# Altium PCB PCBkey.PcbDoc
Units mil, origin at the board's own origin, x right, y up, seen from the top; angles counter-clockwise.
Board outline 6000 x 4000 mil, 2 copper layers (Top Layer, Bottom Layer); 91 components, 86 nets, 358 pads, 2 vias.
Unrouted connection lines stored in the file: 235.
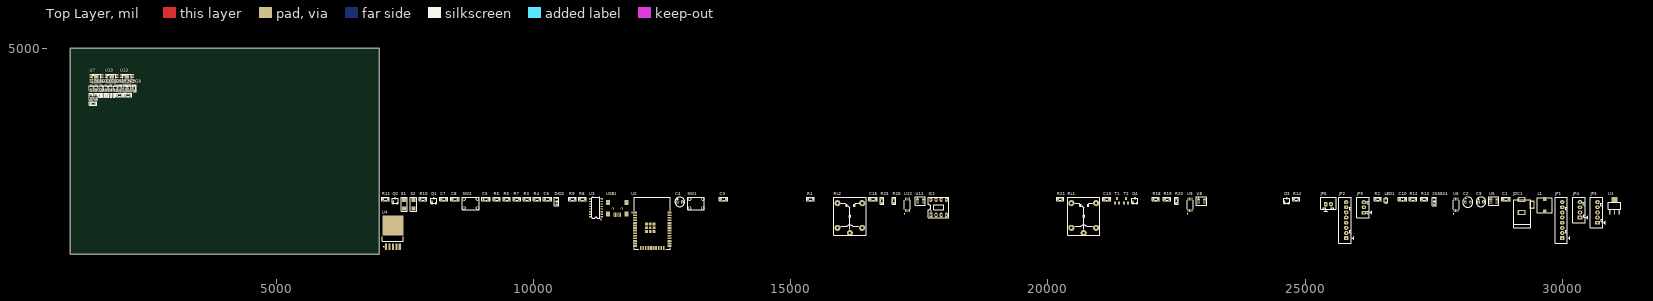
[diagram p0: Top Layer view]
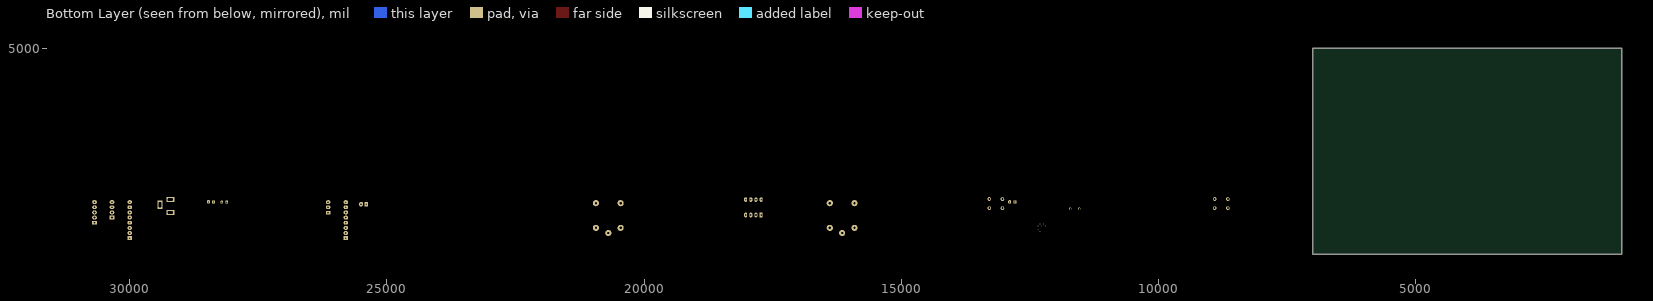
[diagram p1: Bottom Layer view, seen from below]

## Layer stack, top to bottom
Top Solder: solder mask 0.4, Solder Resist, Dk 3.5
Top Layer: signal copper 1.4
Dielectric 1: dielectric 12.6, FR-4, Dk 4.8
Bottom Layer: signal copper 1.4
Bottom Solder: solder mask 0.4, Solder Resist, Dk 3.5

## Board outline
1000,1000 7000,1000 7000,5000 1000,5000

## Design rules (kind name [scope] priority, off if disabled: settings)
Clearance [All] p1: gap=10 ignorepadtopadclearanceinfootprint=FALSE except(0: Arc-Hole Track-Hole SMDPad-Hole THPad-Hole Via-Hole Fill-Hole Poly-Hole Region-Hole Text-Hole)
PolygonConnect [All] p1: connectstyle=Relief reliefconductorwidth=10 reliefentries=4 polygonreliefangle="90 Angle" airgapwidth=10
RoutingVias [All] p1: holewidth=28 width=50 viastyle="Through Hole" minholewidth=28 minwidth=50 maxholewidth=28 maxwidth=50
SolderMaskExpansion [All] p1: expansion=4
Width [All] p1: maxlimit=10 minlimit=10 preferedwidth=10
30 further rules are at their usual default settings.

## Components (designator, comment, footprint, x,y, rotation, side; value= is the part's Value field where it differs from the comment)
1N5824 "Diode SMD" DIO-SMD-123 27505,2025 r90 top value=1N5007
C1 "104" CAP_0805 28900,2075 r0 top value=33p
C2 "680 uF" C5mm 28160,2010 r0 top
C3 "100nF" CAP_0805 13695,2075 r0 top value=33p
C4 "Cap Pol" C3MM 12845,2015 r0 top
C5 "100nF" CAP_0805 9080,2075 r0 top value=33p
C6 "104" CAP_0805 10275,2075 r0 top value=33p
C7 "104" CAP_0805 8260,2075 r0 top value=33p
C8 "104" CAP_0805 8475,2075 r0 top value=33p
C9 "220 uF" C3MM 28415,2015 r0 top
C10 "0.1 uF" CAP_0805 26890,2075 r0 top value=33p
C11 "10 uF" CAP_0402 1736.78,4089.12 r90 top value=33p
C12 "10 uF" CAP_0402 1791.72,4089.12 r90 top value=33p
C13 "0.1 uF" CAP_0805 21145,2075 r0 top value=33p
C14 "10 uF" CAP_0402 1846.65,4089.12 r90 top value=33p
C15 "10 uF" CAP_0402 1571.97,4089.12 r90 top value=33p
C16 "0.1 uF" CAP_0805 16600,2075 r0 top value=33p
C17 "10 uF" CAP_0402 1626.91,4089.12 r90 top value=33p
C18 "10 uF" CAP_0402 1681.84,4089.12 r90 top value=33p
DIO2 "Diode SMD" DIO-SMD-123 10450,2025 r90 top value=1N5007
IC1 "LM741" DIP8/W0.3 17725,1760 r0 top
JDC1 "Jac DC" DC-IN 29305,1935 r90 top
JP1 "KeyPad" CON8 29995,1310 r90 top value="Connector 8"
JP2 "RFID" CON8 25795,1310 r90 top value="Connector 8"
JP3 "motor" CON5 30680,1610 r90 top value="Connector 5"
JP4 "LCD_I2C" CON4 30340,1710 r90 top value="Connector 4"
JP5 "servo" CON3 26140,1810 r90 top value="Connector 3"
JP6 "JP2" CON2 25400,1970 r0 top value="Connector 2"
L1 "33 uH" L-SMD-M-7.3x4.5 29655,1950 r0 top
LED1 "LED" LED-0805-Red 26570,1995 r90 top value="LED 3 ly Single Colour"
LED2 "LED" LED-0805-Red 1689,4178.08 r90 top value="LED 3 ly Single Colour"
LED3 "LED" LED-0805-Green 1783,4178.08 r90 top value="LED 3 ly Single Colour"
LED4 "LED" LED-0805-Red 1877,4178.08 r90 top value="LED 3 ly Single Colour"
LED5 "LED" LED-0805-Green 1407,4178.08 r90 top value="LED 3 ly Single Colour"
LED6 "LED" LED-0805-Red 1501,4178.08 r90 top value="LED 3 ly Single Colour"
LED7 "LED" LED-0805-Green 1595,4178.08 r90 top value="LED 3 ly Single Colour"
Q1 "2N222" SOT23D 8065,2035 r0 top value=C1815
Q2 "2N222" SOT23D 7315,2035 r0 top value=C1815
Q3 "2N222" SOT23D 24640,2035 r0 top value=C1815
Q4 "2N222" SOT23D 21690,2035 r0 top value=C1815
R1 "10k" RES-SMD-0805 15385,2075 r0 top
R2 "1k" RES-SMD-0805 26410,2075 r0 top
R3 "12k" RES-SMD-0805 9875,2075 r0 top
R4 "12k" RES-SMD-0805 10070,2075 r0 top
R5 "470" RES-SMD-0805 9290,2075 r0 top
R6 "470" RES-SMD-0805 9485,2075 r0 top
R7 "10k" RES-SMD-0805 9680,2075 r0 top
R8 "470" RES-SMD-0805 10955,2075 r0 top
R9 "470" RES-SMD-0805 10760,2075 r0 top
R10 "12k" RES-SMD-0805 7855,2075 r0 top
R11 "12k" RES-SMD-0805 7125,2075 r0 top
R12 "1k" RES-SMD-0805 27095,2075 r0 top
R13 "100" RES-SMD-0805 27315,2075 r0 top
R14 "1k" RES-SMD-0805 24825,2075 r0 top
R15 "1k" RES-SMD-0805 1442.5,3928.58 r0 top
R16 "1k" RES-SMD-0805 2121.12,4093.58 r0 top
R17 "1.2k" RES-SMD-0805 1956.12,4093.58 r0 top
R18 "1k" RES-SMD-0805 22095,2075 r0 top
R19 "100" RES-SMD-0805 22315,2075 r0 top
R20 "1k" RES-SMD-0805 22495,2040 r90 top
R21 "1k" RES-SMD-0805 20240,2075 r0 top
R22 "1k" RES-SMD-0805 1497.5,4056.58 r90 top
R23 "1k" RES-SMD-0805 1405.5,4056.58 r90 top
R24 "1.2k" RES-SMD-0805 2061.5,4224.58 r90 top
R25 "1k" RES-SMD-0805 16775,2040 r90 top
R26 "100" RES-SMD-0805 17005,2040 r90 top
R27 "1k" RES-SMD-0805 1969.5,4224.58 r90 top
R28 "1k" RES-SMD-0805 2245.5,4224.58 r90 top
R29 "1.2k" RES-SMD-0805 2153.5,4224.58 r90 top
RL1 "Relay 10A/12V" RL_SPDT_10A 20695,1410 r90 top value="Relay SPDT, 10A, 12V"
RL2 "Relay 10A/12V" RL_SPDT_10A 16150,1410 r90 top value="Relay SPDT, 10A, 12V"
S1 "SW-SMD" "SW 3x2x4" 7490,1970 r90 top
S2 "SW-SMD" "SW 3x2x4" 7670,1970 r90 top
SW1 "SW-4P-S" SW-4P-S 13035,2070 r0 top
SW2 "SW-4P-S" SW-4P-S 8655,2070 r0 top
T1 "A03401" A3401 21345,2040 r0 top
T2 "A03401" A3401 21520,2040 r0 top
U1 "LM1117-ADJ" LM1117-SOP 31010,1870 r0 top
U2 "ESP32-WROOM-32" MODULE_ESP32-WROOM-32 12310,1600 r0 top
U3 "CH340C" SO016 11215,1900 r90 top
U4 "LM2976" TO-263 7270,1380 r90 top
U5 "DW01A" SOT23-6 28665,2030 r0 top
U6 "FS8205A" FS8205A 27935,1960 r90 top
U7 "TP4056" TP4056 1507.86,4413.54 r0 top
U8 "DW01A" SOT23-6 22985,2030 r0 top
U9 "FS8205A" FS8205A 22765,1960 r90 top
U10 "TP4056" TP4056 1803.57,4413.54 r0 top
U11 "DW01A" SOT23-6 17520,2030 r0 top
U12 "FS8205A" FS8205A 17270,1960 r90 top
U13 "TP4056" TP4056 2099.29,4413.54 r0 top
USB1 "USB_M" USB_B_MINI_SMD 11690,1765 r0 top

## Footprints (in the part's own frame and the unit in brackets; to place one, negate y for a bottom-side part, rotate by r counter-clockwise, add the part's x,y. Pads: shape width x height; smd on the part's side, far side on the other; paste and mask are expansions set on the pad)
A3401 [mm] "P-Channel 30V 4A _Ta_ 1.4W _Ta_ Surface Mount SOT-23-3"
  rect 1x1.4 smd: 1(-0.95,-1.1) 2(0.95,-1.1) 3(0,1.1)
  body extent -1.47,-1.33 1.53,1.17, height 1.06
C3MM [mm]
  rect 1.5x1.58 hole 0.6: 1(-1.27,0)
  oval 1.5x1.8 hole 0.6: 2(1.27,0)
  silkscreen extent -2.39,-2.39 2.39,2.39, body extent -2,-2.03 1.99,1.97, height 7.01
C5mm [mm]
  rect 1.3x1.5 hole 0.8: 1(-1.27,0)
  oval 1.3x1.5 hole 0.8: 2(1.27,0)
  silkscreen extent -2.51,-2.51 2.51,2.51, body extent -2.5,-2.5 2.49,2.5, height 11.01
CAP_0402 [mm]
  rect 0.5x0.6 smd: 1(-0.61,0) 2(0.61,0)
  silkscreen extent -0.97,-0.38 0.97,0.41, body extent -0.5,-0.27 0.5,0.26, height 0.35
CAP_0805 [mm]
  rect 1.2x1.4 smd: 1(-1.27,-0.025) 2(1.27,-0.025)
  silkscreen extent -2.03,-0.91 2.03,0.86, body extent -1.01,-0.66 1.01,0.61, height 0.61
CON2 [mil] "CON2"
  rect 75x90 hole 34: 1(0,0)
  oval 75x90 hole 34: 2(100,0)
  silkscreen extent -100,-150 200,140, body extent -68,-70 168,107, height 236
CON3 [mil] "CON 3"
  rect 75x90 hole 34: 1(-5,0)
  oval 75x90 hole 34: 2(100,0) 3(200,0)
  silkscreen extent -100,-150 300,140, body extent -95,-90 295,136, height 276
CON4 [mil] "CON4"
  rect 75x90 hole 34: 1(0,0)
  oval 75x90 hole 34: 2(100,0) 3(200,0) 4(300,0)
  silkscreen extent -100,-150 400,140, body extent -90,-90 398,136, height 276
CON5 [mil] "CON5"
  rect 75x90 hole 34: 1(0,0)
  oval 75x90 hole 34: 2(100,0) 3(200,0) 4(300,0) 5(400,0)
  silkscreen extent -100,-150 500,140
CON8 [mil] "CON8"
  rect 75x90 hole 34: 1(0,0)
  oval 75x90 hole 34: 2(100,0) 3(200,0) 4(300,0) 5(400,0) 6(500,0) 7(600,0) 8(700,0)
  silkscreen extent -100,-150 800,140
DC-IN [mil] "Jac DC input"
  rect 100x160 hole 50 slot 100 at 90 deg: 1(125,100) 2(-125,100)
  rect 160x100 hole 50 slot 100 at 0 deg: 3(25,-100)
  silkscreen extent -425,-80 120,250, body extent -410,-105 134,269, height 434
DIO-SMD-123 [mm]
  rect 0.9x1.2 smd: 1(1.524,0) 2(-1.524,0)
  silkscreen extent -2.16,-1.02 2.16,1.02, body extent -1.76,-0.8 1.94,0.8, height 1.25
DIP8/W0.3 [mil] "8 PIN, W 300mil, Pin to pin 100mil"
  rect 60x90 hole 31: 1(0,0)
  oval 60x90 hole 31: 2(100,0) 3(200,0) 4(300,0) 5(300,300) 6(200,300) 7(100,300) 8(0,300)
  silkscreen extent -50,-50 350,350, body extent -50,-40 350,336, height 201
FS8205A [mm]
  rrect25% 1.56x0.4 smd: 1(-2.88,1.031) 2(-2.88,0.381) 3(-2.88,-0.269) 4(-2.88,-0.919) 5(2.88,-0.919) 6(2.88,-0.269) 7(2.88,0.381) 8(2.88,1.031)
  silkscreen extent -4.54,-1.46 2.25,1.57, body extent -3.2,-1.4 3.2,1.53, height 1.2
L-SMD-M-7.3x4.5 [mm] "WE-PDA SMD Shielded Power Inductor, 7345"
  rect 1.7x2 smd: 1(0,3) 2(0,-3)
  silkscreen extent -3.65,-3.65 3.65,3.65, body extent -3.65,-3.65 3.65,3.65, height 4.05
LED-0805-Green [mil]
  rect 50x55 smd: 1(0,0) 2(90,0)
  silkscreen extent 0,-35 90,35, body extent 5,-25 85,25, height 43
LED-0805-Red [mil]
  rect 50x55 smd: 1(0,0) 2(90,0)
  silkscreen extent 0,-35 90,35, body extent 5,-25 85,25, height 43
LM1117-SOP [mm]
  rect 0.7x2.54 smd: 1(-2.3,-1.27) 2(0,-1.27) 3(2.3,-1.27)
  rect 3x2.54 smd: 2(0,4.826)
  silkscreen extent -3.17,0 3.17,3.56, body extent -3.25,-1.78 3.25,5.18, height 1.68
MODULE_ESP32-WROOM-32 [mm]
  rect 2x0.9 smd: 1(-8.5,5.26) 2(-8.5,3.99) 3(-8.5,2.72) 4(-8.5,1.45) 5(-8.5,0.18) 6(-8.5,-1.09) 7(-8.5,-2.36) 8(-8.5,-3.63) 9(-8.5,-4.9) 10(-8.5,-6.17) 11(-8.5,-7.44) 12(-8.5,-8.71) 13(-8.5,-9.98) 14(-8.5,-11.25) 25(8.5,-11.25) 26(8.5,-9.98) 27(8.5,-8.71) 28(8.5,-7.44) 29(8.5,-6.17) 30(8.5,-4.9) 31(8.5,-3.63) 32(8.5,-2.36) 33(8.5,-1.09) 34(8.5,0.18) 35(8.5,1.45) 36(8.5,2.72) 37(8.5,3.99) 38(8.5,5.26)
  rect 0.9x2 smd: 15(-5.715,-12.25) 16(-4.445,-12.25) 17(-3.175,-12.25) 18(-1.905,-12.25) 19(-0.635,-12.25) 20(0.635,-12.25) 21(1.905,-12.25) 22(3.175,-12.25) 23(4.445,-12.25) 24(5.715,-12.25)
  rect 1.33x1.33 smd: 39_1(-2.835,-0.405) 39_2(-1,-0.405) 39_3(0.835,-0.405) 39_4(-2.835,-2.24) 39_5(-1,-2.24) 39_6(0.835,-2.24) 39_7(-2.835,-4.075) 39_8(-1,-4.075) 39_9(0.835,-4.075)
  round 0.3 hole 0.2: 39_10(-1.917,-0.405) 39_11(-0.082,-0.405) 39_12(-2.835,-1.322) 39_13(-1,-1.322) 39_14(0.835,-1.322) 39_15(-1.917,-2.24) 39_16(-0.082,-2.24) 39_17(-2.835,-3.157) 39_18(-1,-3.157) 39_19(0.835,-3.157) 39_20(-1.917,-4.075) 39_21(-0.082,-4.075)
  silkscreen extent -10.1,-12.75 9,12.75, body extent -10.54,-12.75 8.98,12.75, height 3.2
RES-SMD-0805 [mil]
  rect 39.37x55 smd: 1(-45,0) 2(45,0)
  silkscreen extent -70,-34 70,33, body extent -39,-25 39,25, height 31
RL_SPDT_10A [mil] "Relay SPDT, 5 pin, 10A,W 650mil, L 800mil, H 800mil"
  round 120 hole 45: 1(0,0) 2(580,240) 3(580,-240) 4(100,-240) 5(100,240)
  silkscreen extent -40,-315 700,315
SO016 [mm]
  rect 0.6x1.2 smd: 1(-4.445,-2.8) 2(-3.175,-2.8) 3(-1.905,-2.8) 4(-0.635,-2.8) 5(0.635,-2.8) 6(1.905,-2.8) 7(3.175,-2.8) 8(4.445,-2.8) 9(4.445,2.8) 10(3.175,2.8) 11(1.905,2.8) 12(0.635,2.8) 13(-0.635,2.8) 14(-1.905,2.8) 15(-3.175,2.8) 16(-4.445,2.8)
  silkscreen extent -5.84,-2.67 5.26,1.95
SOT23-6 [mm] "SOT23, 5-Leads, Body 3.0x3.0mm (max), Pitch 0.95mm, IPC Medium Density"
  rect 1.5x0.6 smd: 1(-1.5,0.95) 2(-1.5,0) 3(-1.5,-0.95) 4(1.5,-0.95) 5(1.5,0) 6(1.5,0.95)
  silkscreen extent -2.54,-2.11 2.54,2.11, body extent -1.75,-1.52 1.75,1.53, height 1.45
SOT23D [mm] "SOT 23C - 1-3-2 - BCE"
  rect 0.85x1.2 smd: 1(-0.95,-1.25) 2(0.94,-1.245) 3(0,1.25)
  silkscreen extent -1.5,-1.14 1.5,1.32, body extent -1.5,-1.17 1.5,1.33, height 1.06
"SW 3x2x4" [mm]
  rect 2x2 smd: 1(-2.2,0) 2(2.2,0)
  silkscreen extent -3.5,-1.5 3.5,1.5, body extent -2.45,-1.45 2.45,1.45, height 2
SW-4P-S [mm]
  round 1.8 hole 1: 1(0,0) 2(0,-4.47) 3(6.502,-4.47) 4(6.477,0.025)
  silkscreen extent -0.91,-5.18 7.34,0.79, body extent -0.86,-5.23 7.35,0.76, height 9.52
TO-263 [mm]
  rect 3.2x1.05 smd: 1(-6,3.4) 2(-6,1.7) 3(-6,0) 4(-6,-1.7) 5(-6,-3.4)
  rect 10x10.45 smd: 6(4.5,0)
  silkscreen extent -6.12,-5.2 -1.1,5.2, body extent -6.58,-5.2 7.57,5.2, height 4.65
TP4056 [mm]
  rect 1.3x0.7 smd: 1(-2.75,1.905) 2(-2.75,0.635) 3(-2.75,-0.635) 4(-2.75,-1.905) 5(2.75,-1.905) 6(2.75,-0.635) 7(2.75,0.635) 8(2.75,1.905)
  rect 2.3x3.2 smd: GND(-0.025,0)
  silkscreen extent -2.1,-2.2 2.1,2.2, body extent -3.13,-2.45 2.87,2.45, height 1.75
USB_B_MINI_SMD [mm]
  rect 2x2.5 smd: 0(-6.075,0.305) 0(-6.071,6.045) 0(2.925,0.305) 0(2.929,6.045)
  rect 0.5x2.25 smd: 1(0,0) 2(-0.787,-0.013) 3(-1.575,-0.025) 4(-2.362,-0.038) 5(-3.15,-0.051)
  body extent -6.92,-0.37 3.78,8.83, height 3.95

## Part data
1N5824 DIO2: "Default Diode", Code - JEDEC=DO-214-AB, Published=8-Jun-2000, Publisher="Altium Limited", Revision="July-2002: Re-released for DXP Platform."
C1 C3 C5 C6 C7 C8 C10 C11 C12 C13 C14 C15 C16 C17 C18: library part CapSMD, "Capacitor", LatestRevisionDate=17-Jul-2002, LatestRevisionNote="Re-released for DXP Platform.", PackageReference=RAD-0.3, Published=8-Jun-2000, Publisher="Altium Limited"
C2 C9: library part "Cap Pol", "Polarized Capacitor (Axial)", LatestRevisionDate=17-Jul-2002, LatestRevisionNote="Re-released for DXP Platform.", PackageReference=POLAR0.8, Published=8-Jun-2000, Publisher="Altium Limited"
C4: "Polarized Capacitor (Axial)", LatestRevisionDate=17-Jul-2002, LatestRevisionNote="Re-released for DXP Platform.", PackageReference=POLAR0.8, Published=8-Jun-2000, Publisher="Altium Limited"
IC1: "Single OA"
JDC1: library part DCIN, "Jac DC input"
JP1 JP2: library part Con8, "Connector 8"
JP3: library part Con5, "Connector 5"
JP4: library part Con4, "Connector 4"
JP5: library part Con3, "Connector 3"
JP6: library part Con2, "Connector 2"
L1: library part L-SMD-1, Inductance="1.0 µH", Manufacturer="Wurth Elektronik", partNo=78477010, ComponentLink1Description=Manufacturer, ComponentLink1URL=http://www.we-online.de, ComponentLink2Description=Datasheet, ComponentLink2URL=http://katalog.we-online.de/pbs/datasheet/78477010.pdf, Created by="Baojun Chen", Created Date=Nov.2015
LED1 LED2 LED3 LED4 LED5 LED6 LED7: "LED Single colour Green and Red"
Q1 Q2 Q3 Q4: "NPN 600mW, ECB", =C2383
R1 R2 R3 R4 R5 R6 R7 R8 R9 R10 R11 R12 R13 R14 R15 R16 R17 R18 R19 R20 R21 R22 R23 R24 R25 R26 R27 R28 R29: library part "Resistor - SMD", "Resistor", Manufacturer="Generic Components", Class=Passive, Published=08/06/2000, Publisher="Altium Hobart Technology Centre"
RL1 RL2: library part "Relay 1", "Relay SPDT,10A - 12VDC 5 Pin", ="Relay SPDT, 10A, 24V"
S1 S2: "Switch", LatestRevisionDate=17-Jul-2002, LatestRevisionNote="Re-released for DXP Platform.", PackageReference=SPST-2, Published=24-Mar-1999, Publisher="Altium Limited"
SW1 SW2: library part SW-4PIN-SMALL, "Switch Small 4 Pin", LatestRevisionDate=17-Jul-2002, LatestRevisionNote="Re-released for DXP Platform.", PackageReference=SPST-2, Published=24-Mar-1999, Publisher="Altium Limited"
T1 T2: "P-Channel 30V 4A _Ta_ 1.4W _Ta_ Surface Mount SOT-23-3"
U1: "800mA Low-Dropout Linear Regulator", Creator="Nguyen Ba Bien", Website=http://group3i.net
U2: "Bluetooth, WiFi Transceiver Module 2.4GHz ~ 2.5GHz Surface Mount", Package="Module Espressif Systems", Digi-Key_Part_Number=1904-1010-1-ND, Digi-Key_Purchase_URL=https://www.digikey.com/product-detail/en/espressif-systems/ESP32-WROOM-32/1904-1010-1-ND/8544305?utm_source=snapeda&utm_medium=aggregator&utm_campaign=symbol, MF="Espressif Systems", MP=ESP32-WROOM-32, SnapEDA_Link=https://www.snapeda.com/parts/ESP32-WROOM-32/Espressif%20Systems/view-part/2753322/?ref=snap
U3: "USB to serial chip CH340", Package=Package, Availability=Unavailable, Check_prices=https://www.snapeda.com/parts/CH340C/WCH/view-part/5428851/?ref=eda, MF=WCH, MP=CH340C, Price=None, SnapEDA_Link=https://www.snapeda.com/parts/CH340C/WCH/view-part/5428851/?ref=snap
U4: library part LM2596, Max Input Voltage="12 V", Max Output Current="3 (6.0 peak) A", Max Output Voltage=mV, Temperature Range="-40 to +125 degC", Category=IC-Power, Min Input Voltage=mV, Min Output Voltage=mV, Mounting Technology="Surface Mount", Status=Unreleased, Supply Voltage=mV
U5 U8 U11: "One Cell Lithium-ion/Polymer Battery Protection IC"
U7 U10 U13: "Complete single cell Li-Ion battery with a constant current / constant voltage linear charger"

## Via types
v1: diameter 47.24, hole 39.37, Top Layer to Bottom Layer, 2 vias

## Nets (pads, with @x,y where several pads share a name; then routed paths per layer and width w, separated by ;. In a path a pad name is that pad's centre, name@x,y a point inside that pad or via, vN(x,y) a via of type N, cw(c..) or ccw(c..) an arc to the next point about the centre after c; other vN are vias at no path point)
AccessPoint: C5.2 R7.2 SW2.2 SW2.3 U2.7
ADC2_CH8: C13.1 C18.1 R26.2 U2.10 U8.6 U9.2 U9.3 U13.5
BOOT: Q2.3 R4.1 R6.2 U2.25
COL1: JP1.5 U2.24
COL2: JP1.6 U2.26
COL3: JP1.7 U2.27
COL4: JP1.8 U2.28
Control: C3.2 R1.2 SW1.2 SW1.3 U2.6
control1: R14.2 T1.1 U2.11
control2: R20.2 T2.1 U2.12
"Control Charge": IC1.6 RL2.4
DTR: Q2.2 R10.2 U3.13
EN: Q1.3 R3.1 R5.2 U2.3
Encoder: JP3.3 U2.9
G11: U5.1 U6.4
G12: U8.1 U9.4
G13: U11.1 U12.4
G21: U5.3 U6.5
G22: U8.3 U9.5
G23: U11.3 U12.5
GND: 1N5824.1 C1.1 C2.2 C3.1 C4.2 C5.1 C6.1 C7.1 C8.1 C9.2 C11.2 C12.2 C14.2 C15.2 C16.1 C17.2 C18.2 IC1.2 JDC1.2 JDC1.3 JP2.3 JP3.5 JP4.1 JP5.3 JP6.2 LED1.2 R12.1 R17.1 R18.1 R21.2 R24.1 R25.1 R29.1 RL1.5 RL2.5 S1.2 S2.2 SW1.1 SW1.4 SW2.1 SW2.4 U1.1 U2.1 U2.15 U2.38 U2.39_1 U2.39_2 U2.39_3 U2.39_4 U2.39_5 U2.39_6 U2.39_7 U2.39_8 U2.39_9 U2.39_10 U2.39_11 U2.39_12 U2.39_13 U2.39_14 U2.39_15 U2.39_16 U2.39_17 U2.39_18 U2.39_19 U2.39_20 U2.39_21 U3.1 U4.3 U4.5 U6.6 U6.7 U7.3 U9.6 U9.7 U10.3 U11.6 U12.2 U12.3 U12.6 U12.7 U13.3 USB1.5
IRQ: JP2.4
Led3: LED7.2 R28.1
MISO: JP2.5 U2.31
MOSI: JP2.6 U2.37
motor1: JP3.2 T1.2
motor2: JP3.1 T2.2
Net1N5824_2: 1N5824.2 L1.1 U4.2
NetC6_2: C6.2 U3.4
NetC10_2: C10.2 R13.1 U5.5
NetC13_2: C13.2 R19.1 U8.5
NetC16_2: C16.2 R26.1 U11.5
NetDIO2_1: DIO2.1 USB1.1
NetLED1_1: LED1.1 R2.2
NetLED2_2: LED2.2 R15.1
NetLED3_2: LED3.2 R16.1
NetLED4_2: LED4.2 R22.1
NetLED5_2: LED5.2 R23.1
NetLED6_2: LED6.2 R27.1
NetQ1_1: Q1.1 R10.1
NetQ2_1: Q2.1 R11.1
NetQ3_1: Q3.1 R14.1
NetQ4_1: Q4.1 R20.1
NetR5_1: R5.1 S1.1
NetR6_1: R6.1 S2.1
NetR8_1: R8.1 U3.2
NetR9_1: R9.1 U3.3
NetR12_2: R12.2 U5.4
NetR15_2: R15.2 U7.7
NetR16_2: R16.2 U7.6
NetR17_2: R17.2 U7.2
NetR18_2: R18.2 U8.4
NetR22_2: R22.2 U10.7
NetR23_2: R23.2 U10.6
NetR24_2: R24.2 U10.2
NetR25_2: R25.2 U11.4
NetR27_2: R27.2 U13.7
NetR28_2: R28.2 U13.6
NetR29_2: R29.2 U13.2
NetU6_1: U6.1 U6.8
NetU9_1: U9.1 U9.8
NetU12_1: U12.1 U12.8
OUT+: C12.1 JP6.1 R13.2 RL1.2 U7.5
pin: IC1.3 U2.8
PIN1-: C10.1 C15.1 R19.2 U5.6 U6.2 U6.3 U10.5
ROW1: JP1.1 U2.13
ROW2: JP1.2 U2.14
ROW3: JP1.3 U2.16
ROW4: JP1.4 U2.23
RST: JP2.2
RTS: Q1.2 R11.2 U3.14
RX0: R8.2 U2.34
SCK: JP2.7 U2.30
SCL_I2C: JP4.4 U2.36
SDA_I2C: JP4.3 U2.33
servo: JP5.1 Q3.2 Q4.2 R21.1
Source: C2.1 RL1.1 U4.1
SS: JP2.8 U2.29
TX0: R9.2 U2.35
UD+: U3.5 USB1.3
UD-: U3.6 USB1.2
VccUSB: DIO2.2 U3.16
Vcharge: C11.1 C14.1 C17.1 LED2.1 LED3.1 LED4.1 LED5.1 LED6.1 LED7.1 RL2.1 U7.4 U7.8 U10.4 U10.8 U13.4 U13.8
VDD3V3: C1.2 C4.1 JP2.1 JP3.4 R1.1 R3.2 R4.2 R7.1 U1.2 U2.2
VDD5V: C7.2 C8.2 C9.1 JP4.2 JP5.2 L1.2 Q3.3 Q4.3 R2.1 RL2.3 T1.3 T2.3 U1.3 U4.4
VIN: JDC1.1 RL1.3 RL1.4
pads on no net: IC1.1 IC1.4 IC1.5 IC1.7 IC1.8 RL2.2 U2.4 U2.5 U2.17 U2.18 U2.19 U2.20 U2.21 U2.22 U2.32 U3.7 U3.8 U3.9 U3.10 U3.11 U3.12 U3.15 U4.6 U5.2 U7.1 U7.GND U8.2 U10.1 U10.GND U11.2 U13.1 U13.GND USB1.0 USB1.4
copper on no net:
  other v1: 11541.39,1878.57 11714.61,1878.57

## Text inside footprints (layer, text, board x,y; h text height)
C2: Top Overlay "+" at 28105,2043 h47.24
U2: Mechanical 13 "ANTENNA" at 12073.78,1954.33 h70